# Altium PCB miaow_foc_board.PcbDoc (part 2 of 2)
Units mil, origin at the board's own origin, x right, y up, seen from the top; angles counter-clockwise.
Board outline 3070.7 x 3057.58 mil, 6 copper layers (SIG01, GND02, SIG03, PWR04, GND05, SIG06), stack 60.567 mil thick; 396 components, 384 nets, 1886 pads, 189 vias.
Unrouted connection lines stored in the file: 864.
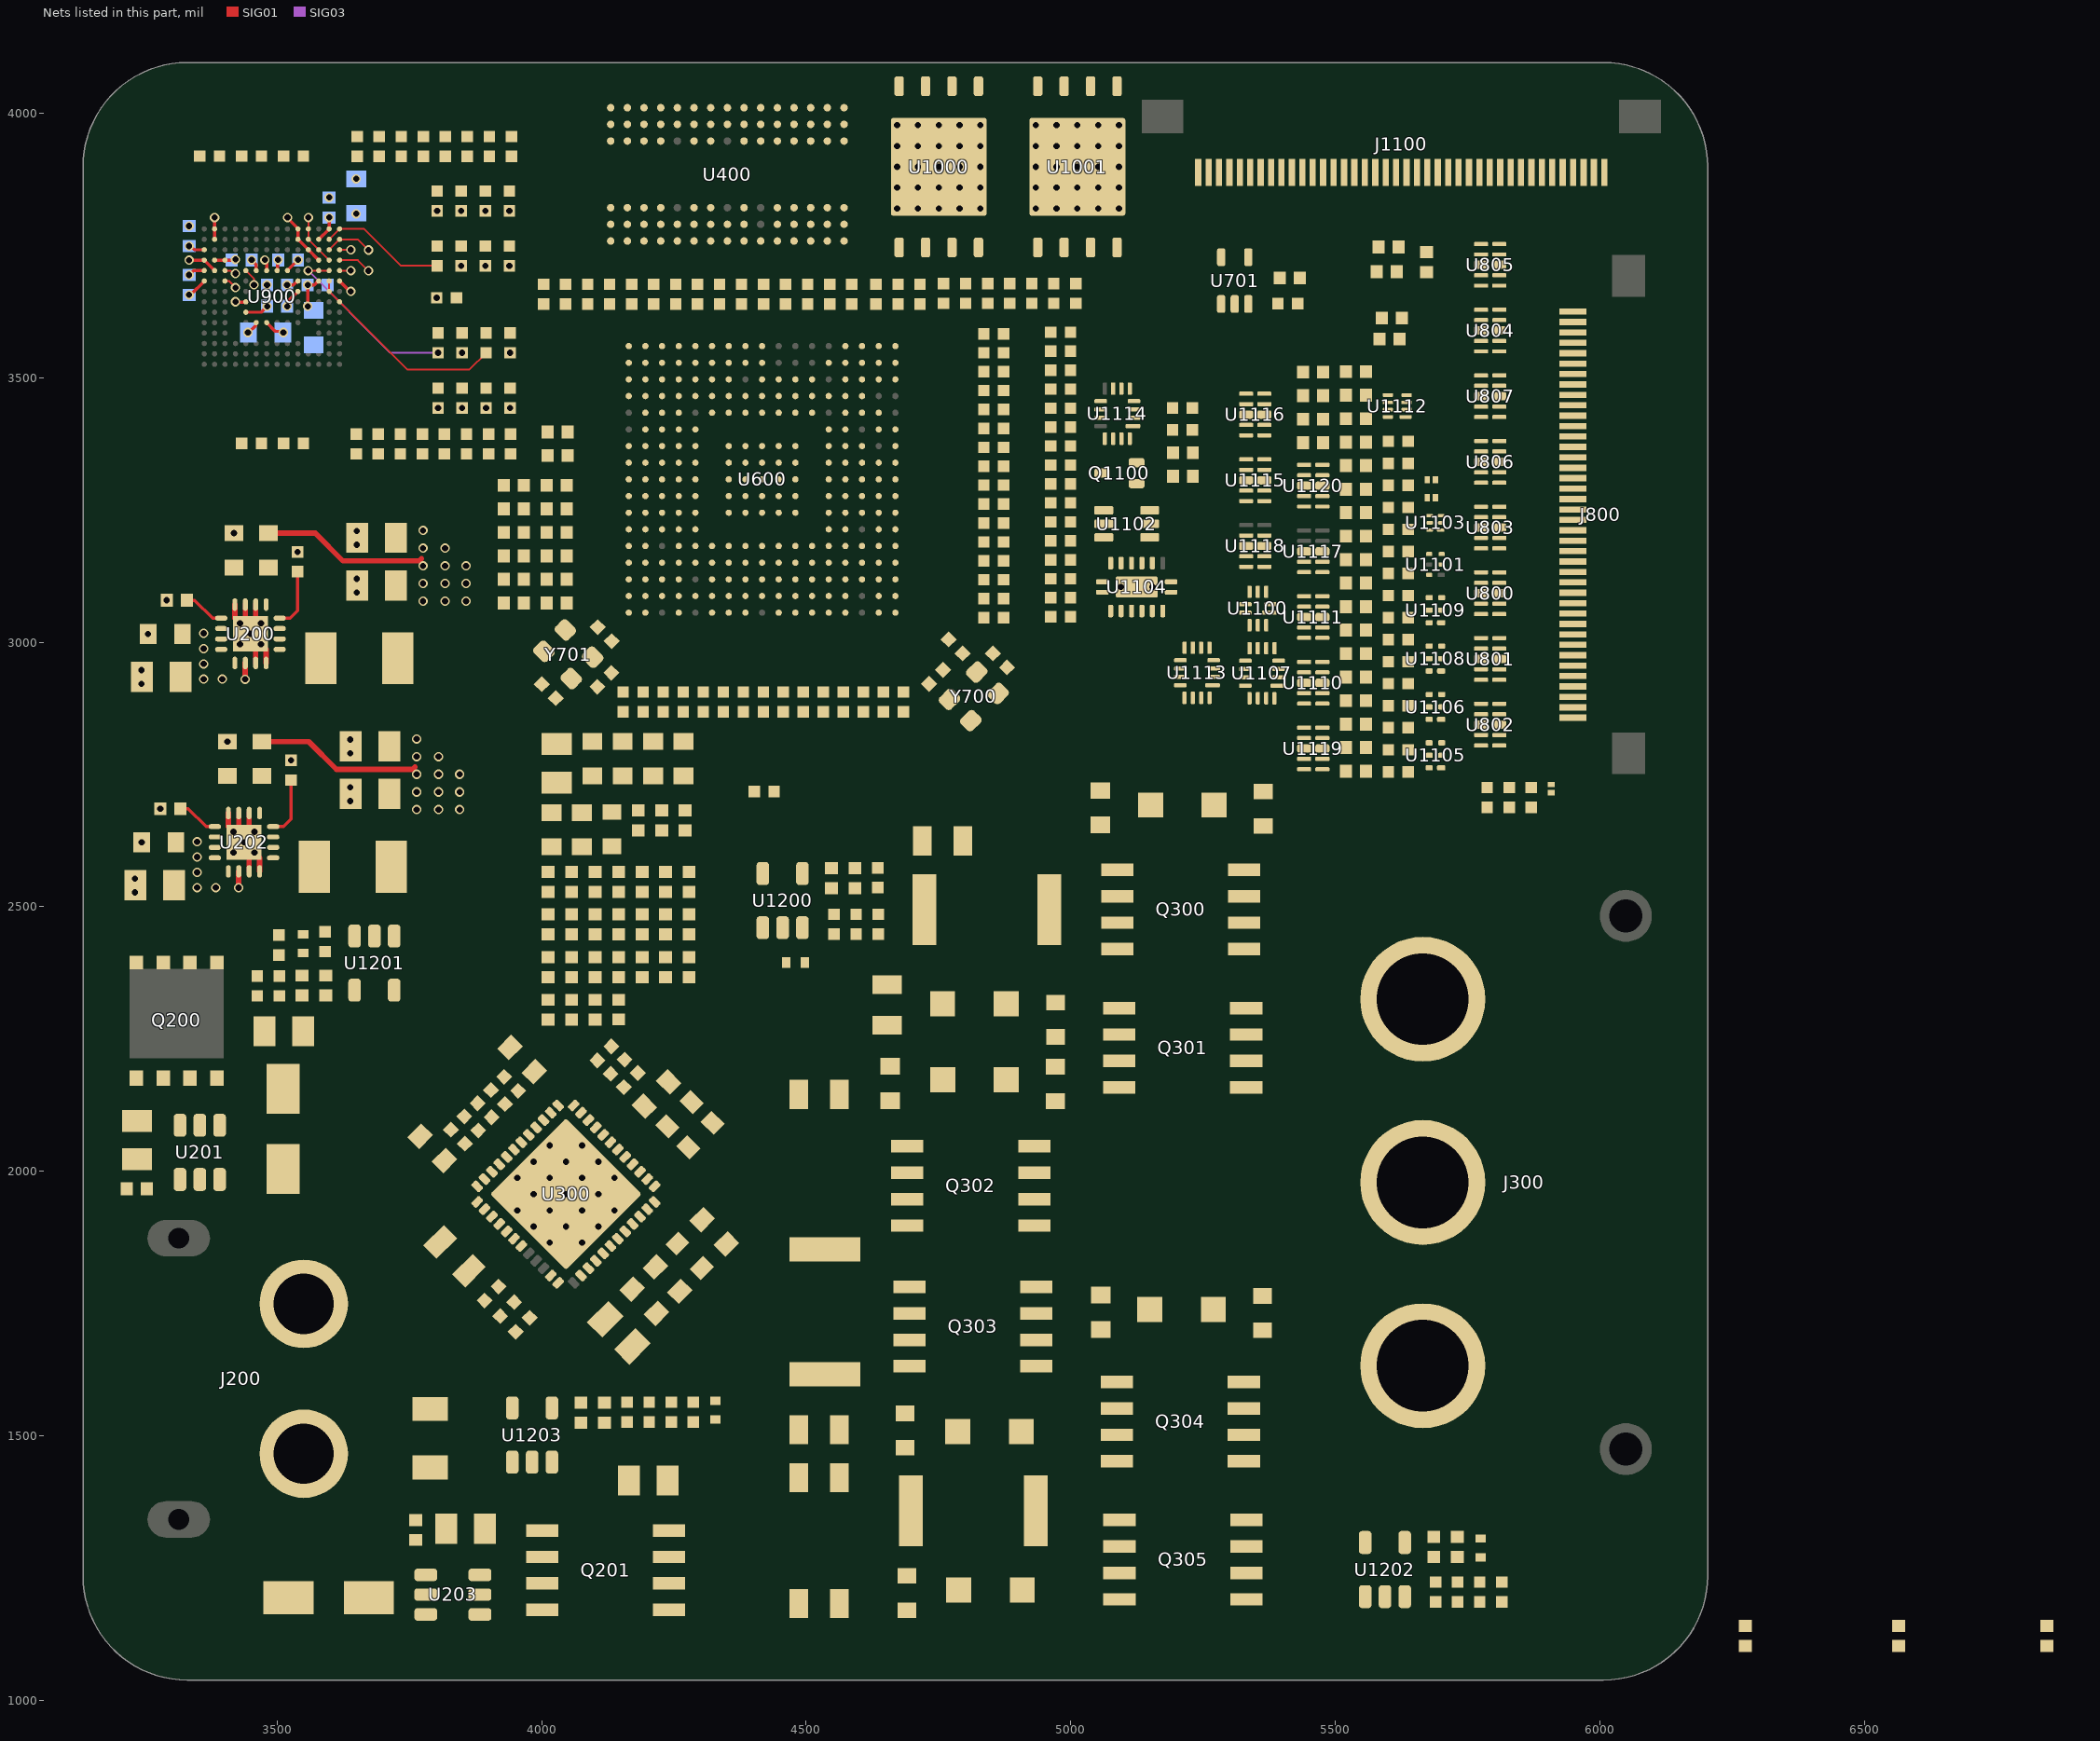
[diagram p6: the nets of this part, all layers, seen from the top]

## Part data
C200 C201 C205 C206 C207 C210 C211 C212 C214 C215 C300 C301 C302 C303 C304 C305 C306 C307 C308 C309 C310 C311 C312 C400 C401 C402 C403 C404 C405 C406 C407 C408 C409 C410 C411 C412 C413 C600 C601 C602 C603 C604 C605 C606 C607 C608 C609 C610 C611 C612 C613 C614 C615 C616 C617 C618 C619 C620 C621 C622 C623 C624 C625 C626 C627 C628 C629 C630 C631 C632 C633 C700 C701 C702 C703 C704 C705 C900 C901 C902 C903 C904 C905 C906 C907 C908 C909 C910 C1000 C1001 C1100 C1101 C1102 C1103 C1104 C1105 C1106 C1107 C1108 C1109 C1110 C1111 C1112 C1113 C1114 C1115 C1116 C1117 C1118 C1119 C1120 C1121 C1200 C1201 C1202 C1203 C1204 C1205 C1206 C1207: voltage=25V, precision=5%
C202 C203 C204 C208 C209 C213: voltage=50V, precision=5%
D200 D201: "TVS/ESD", Supplier Part Number 1=C316048, Supplier 1=LCSC
D300 D301 D302 D303 D304 D305: "TVS/ESD", Supplier Part Number 1=C123803, Supplier 1=LCSC
D800 D1100 D1101: "TVS/ESD", Supplier Part Number 1=C477989, Supplier 1=LCSC
J200: "CONNECTOR - dc supply", Supplier Part Number 1=C98732, Supplier 1=LCSC
J300: "CONNECTOR - 3pin, power", Supplier Part Number 1=C7437310, Supplier 1=LCSC
J800: library part FPC-RGBLCD, Supplier Part Number 1=C262674, Supplier 1=LCSC
J1100: library part FPC-DEBUG, "FPC", Supplier Part Number 1=C262674, Supplier 1=LCSC
L600: library part L, Code_IEC=1005, Code_JEITA=0402, LatestRevisionDate=29-May-2009, LatestRevisionNote="IPC-7351 Footprint Added.", PackageDescription="Chip Inductor", PackageReference=0402-A, Published=8-Jun-2000, Publisher="Altium Limited"
Q200: "NMOS", Supplier Part Number 1=C115943, Supplier 1=LCSC
Q201: "NMOS", Supplier Part Number 1=C535695, Supplier 1=LCSC
Q300 Q301 Q302 Q303 Q304 Q305: Supplier Part Number 1=C535695, Supplier 1=LCSC
Q1100: "PMOS", Supplier Part Number 1=C5334586, Supplier 1=LCSC
RT1200 RT1201 RT1202 RT1203: "NTC - 10K, 3380, 1%", Supplier Part Number 1=C13564, precision=1%, Supplier 1=LCSC
U200 U202: Supplier Part Number 1=C43590, Supplier 1=LCSC
U201 U203: "IDEAL DIODE", Supplier Part Number 1=C2941042, Supplier 1=LCSC
U300: Supplier Part Number 1=C545497, Supplier 1=LCSC
U400: Supplier Part Number 1=C1351419, ClassName=BGA, Supplier 1=LCSC
U600: "MCU", Supplier Part Number 1=C405932, Supplier 1=LCSC
U701: "AND GATE  - 1bit", Supplier Part Number 1=C7832, Supplier 1=LCSC
U800 U801 U802 U803 U804 U805 U806 U807 U1110 U1111 U1115 U1116 U1117 U1118 U1119 U1120: "TVS/ESD", Supplier Part Number 1=C2827679, Supplier 1=LCSC
U900: "EMMC", Supplier Part Number 1=826874-KLMAG2GEND-B031, Supplier 1="Win Source"
U1000 U1001: Supplier Part Number 1=C2802978, Supplier 1=LCSC
U1100: "LEVEL SHIFT", Supplier Part Number 1=C1882550, Supplier 1=LCSC
U1101: "INVERTER - 1bit schmitt", Supplier Part Number 1=C2878125, Supplier 1=LCSC
U1102: "LEVEL SHIFT", Supplier Part Number 1=C324081, Supplier 1=LCSC
U1103: "LEVEL SHIFT - 1bit, 0.65V - 3.6V, 500Mbps", Supplier Part Number 1=C2677436, Supplier 1=LCSC
U1104: "LEVEL SHIFT", Supplier Part Number 1=C22414342, Supplier 1=LCSC
U1105 U1106 U1108 U1109: "SCHMITT - 2bits", Supplier Part Number 1=C548609, Supplier 1=LCSC
U1107 U1113: "LEVEL SHIFT - 4bits, 0.65V - 3.6V, 310Mbps", Supplier Part Number 1=C779392, Supplier 1=LCSC
U1112: Supplier Part Number 1=C2652935, ComponentLink1Description=Datasheet, ComponentLink1URL=..\ds\txs0102dqer.pdf, Supplier 1=LCSC
U1114: "LEVEL SHIFT - 4bits, 2grps, 1.2V - 3.6V, 380Mbps", Supplier Part Number 1=C133244, Supplier 1=LCSC
U1200 U1201 U1202 U1203: "OPA - 1ch, 1.8V - 5.5V, r2r, 0.3mV, 10MHz, 10nVHz^0.5, 0.5pA", Supplier Part Number 1=C398358, Supplier 1=LCSC
Y700: Supplier Part Number 1=C717683, Supplier 1=LCSC
Y701: Supplier Part Number 1=C669098, Supplier 1=LCSC
L200 L201: Code_IEC=1005, Code_JEITA=0402, LatestRevisionDate=29-May-2009, LatestRevisionNote="IPC-7351 Footprint Added.", PackageDescription="Chip Inductor", PackageReference=0402-A, Published=8-Jun-2000, Publisher="Altium Limited"
R200 R201 R202 R203 R204 R205 R206 R300 R301 R302 R303 R304 R305 R306 R307 R308 R309 R310 R311 R312 R313 R314 R315 R316 R317 R318 R319 R320 R321 R322 R323 R324 R325 R326 R327 R328 R329 R600 R700 R701 R702 R703 R704 R705 R706 R707 R708 R709 R710 R711 R712 R713 R714 R715 R716 R717 R718 R719 R720 R721 R722 R723 R724 R725 R726 R727 R728 R729 R730 R731 R732 R733 R734 R735 R736 R737 R738 R739 R740 R741 R742 R743 R744 R745 R746 R747 R748 R749 R750 R751 R752 R753 R754 R755 R756 R757 R758 R759 R760 R761 R762 R763 R764 R765 R766 R767 R768 R769 R770 R771 R772 R773 R774 R775 R776 R777 R778 R779 R780 R781 R782 R783 R784 R785 R786 R787 R800 R801 R802 R900 R901 R902 R903 R904 R905 R906 R907 R908 R909 R910 R911 R912 R913 R914 R915 R916 R917 R918 R919 R920 R921 R1000 R1001 R1002 R1003 R1004 R1005 R1006 R1007 R1008 R1100 R1101 R1102 R1103 R1104 R1105 R1106 R1107 R1108 R1109 R1110 R1111 R1112 R1113 R1114 R1115 R1200 R1201 R1202 R1203 R1204 R1205 R1206 R1207 R1208 R1209 R1210 R1211 R1212 R1213 R1214 R1215 R1216: precision=1%

## Via types
v1: diameter 17.72, hole 11.81, SIG01 to SIG06, 166 vias
v2: diameter 17.72, hole 11.81, SIG01 to SIG06, tented top, 21 vias
v3: diameter 15.75, hole 11.81, SIG01 to SIG06, 2 vias

## Nets (pads, with @x,y where several pads share a name; then routed paths per layer and width w, separated by ;. In a path a pad name is that pad's centre, name@x,y a point inside that pad or via, vN(x,y) a via of type N, cw(c..) or ccw(c..) an arc to the next point about the centre after c; other vN are vias at no path point)
+3.3V: C1202.2 C1203.2 C1206.2 C1207.2 R1201.1 R1203.1 R1209.1 R1211.1 RT1200.2 RT1201.2 RT1202.2 RT1203.2 U1200.5 U1201.5 U1202.5 U1203.5
+3V3: C200.2 C201.2 C302.2 C307.1 C400.2 C401.2 C402.2 C403.2 C404.2 C405.2 C406.2 C407.2 C408.2 C409.2 C410.2 C411.2 C412.2 C413.2 C600.2 C601.2 C602.2 C603.2 C604.2 C605.2 C606.2 C607.2 C608.2 C609.2 C610.2 C611.2 C612.2 C613.2 C614.2 C615.2 C616.2 C617.2 C618.2 C619.2 C620.2 C621.2 C625.2 C626.2 C627.2 C628.2 C629.2 C702.2 C703.1 C704.1 C705.1 C900.2 C901.2 C902.2 C903.2 C904.2 C905.2 C906.2 C907.2 C908.2 C909.2 C910.2 C1000.2 C1001.2 C1100.2 C1101.1 C1102.2 C1104.2 C1105.1 C1106.2 C1107.1 C1108.1 C1109.1 C1114.1 C1115.2 C1116.2 C1117.1 C1118.1 C1119.1 C1120.2 C1121.2 J800.6 J800.7 J1100.6 J1100.7 L200.2 L600.1 Q1100.S R200.2 R201.2 R302.1 R303.1 R304.1 R772.1 R784.2 R786.1 R787.1 R900.1 R902.1 R904.1 R906.1 R908.1 R910.1 R912.1 R914.1 R916.1 R920.1 R1000.2 R1100.1 U200.14 U300.26 U300.36 U400.A7 U400.B2 U400.B7 U400.C9 U400.D9 U400.E1 U400.F9 U400.L1 U400.L7 U400.M9 U400.N9 U400.P2 U400.P7 U400.R7 U600.A6 U600.B1 U600.C17 U600.E6 U600.E9 U600.E11 U600.F5 U600.F17 U600.G5 U600.G13 U600.G17 U600.H5 U600.H13 U600.J13 U600.K5 U600.K13 U600.L5 U600.L13 U600.M5 U600.M13 U600.N7 U600.N8 U600.N10 U600.N11 U600.N12 U600.P17 U600.U12 U701.5 U900.B1 U900.C2 U900.C6 U900.E6 U900.F5 U900.J10 U900.K9 U900.M4 U900.N4 U900.P3 U900.P5 U1000.8 U1001.8 U1100.1 U1100.6 U1100.7 U1101.6 U1102.1 U1102.6 U1103.1 U1103.5 U1103.6 U1104.1 U1104.16 U1107.5 U1107.13 U1107.14 U1107.15 U1112.1 U1112.8 U1113.5 U1113.13 U1113.14 U1113.15 U1114.2 U1114.3 U1114.5 Y700.4 Y701.4 | length 679.4
  SIG01 w6: v1(3333.65,3694.44) 3334.22,3694.44 3342.32,3702.54 U900.P5@3362.18,3702.54 ; v1(3333.65,3748.81) 3336.62,3748.81 3343.52,3741.91 U900.P3@3362.18,3741.91 ; U900.N4@3381.87,3722.22 3413.79,3722.22 v1@3414.09,3722.52 ; v1@3418.79,3722.22 v1@3419.09,3722.52 ; U900.K9@3440.92,3623.8 3470.16,3623.8 v1(3481.31,3634.94) ; v1(3444.79,3585.49) 3446.48,3585.49 3459.87,3598.88 3459.87,3603.38 U900.J10@3460.61,3604.11 ; v1(3518.81,3675.4) 3531.11,3675.4 3538.56,3682.85 U900.E6@3539.35,3682.85 ; U900.F5@3519.66,3702.54 3519.66,3702.78 v1(3539.53,3722.65) ; v1@3537.53,3720.41 v1@3537.53,3722.65 ; v1(3558,3634.94) v1(3558,3675.4) 3570.46,3675.4 3577.91,3682.85 U900.C6@3578.72,3682.85 ; U900.C2@3578.72,3761.59 U900.B1@3598.4,3781.28 v1(3598.4,3802.94)
  SIG01 w10: v1(3439.46,2929.92) 3439.65,2930.11 3439.65,2960.7 U200.14@3439.83,2960.88 ; R201.2@3483.45,3206.23 3572.03,3206.23 3624.63,3153.63 3768.62,3153.63 3772.96,3157.98
  other v1: 3775.88,3077.59 3817.33,3077.59 3857.23,3077.59 3775.88,3111.01 3817.33,3111.01 3857.23,3111.01 3775.88,3144.43 3817.33,3144.43 3857.23,3144.43 3538.53,3170.8 3775.88,3177.85 3817.33,3177.85 3775.88,3211.28 3849.59,3442.99 3940.54,3442.99 3849.59,3547.07 3940.54,3547.07 3848,3711.47 3938.96,3711.47 3421.37,3723.65 3649.52,3810.02 3848,3815.54 3938.96,3815.54
+5V: C210.2 C211.2 J800.1 J800.2 J1100.1 J1100.2 L201.2 R204.2 R205.2 U202.14 | length 344.2
  SIG01 w10: v1(3427.21,2535.93) 3427.4,2536.11 3427.4,2566.7 U202.14@3427.58,2566.88 ; 3471.2,2812.23 3559.78,2812.23 3612.38,2759.64 3756.37,2759.64 3760.71,2763.98
  other v1: 3763.63,2683.59 3805.08,2683.59 3844.98,2683.59 3763.63,2717.01 3805.08,2717.01 3844.98,2717.01 3763.63,2750.43 3805.08,2750.43 3844.98,2750.43 3526.28,2776.8 3763.63,2783.86 3805.08,2783.86 3406.28,2812.23 3763.63,2817.28
_9: J1100.9 R1101.2 U1110.1 U1110.10
_10: J1100.10 U1100.4 U1110.2 U1110.9
_11: J1100.11 R1105.2 U1110.4 U1110.7
_13: J1100.13 R1107.2 U1110.5 U1110.6
_14: J1100.14 R1108.2 U1111.1 U1111.10
_15: J1100.15 R1109.2 U1111.2 U1111.9
_16: J1100.16 R1110.2 U1111.4 U1111.7
_17: J1100.17 R1111.2 U1111.5 U1111.6
_19: J1100.19 U1105.6 U1115.1 U1115.10
_20: J1100.20 U1105.4 U1115.2 U1115.9
_21: J1100.21 U1106.6 U1115.4 U1115.7
_22: J1100.22 U1106.4 U1115.5 U1115.6
_23: J1100.23 U1108.1 U1116.1 U1116.10
_24: J1100.24 U1108.3 U1116.2 U1116.9
_25: J1100.25 U1109.1 U1116.4 U1116.7
_26: J1100.26 U1109.3 U1116.5 U1116.6
_27: J1100.27 U1112.7 U1117.1 U1117.10
_28: J1100.28 U1112.6 U1117.2 U1117.9
_29: J1100.29 R1113.1 U1118.1 U1118.10
_30: J1100.30 R1114.1 U1118.2 U1118.9
_31: J1100.31 U1114.9 U1118.4 U1118.7
_32: J1100.32 U1107.12 U1119.1 U1119.10
_33: J1100.33 U1107.11 U1119.2 U1119.9
_34: J1100.34 U1107.10 U1119.4 U1119.7
_35: J1100.35 U1107.9 U1119.5 U1119.6
_36: J1100.37 U1113.12 U1120.1 U1120.10
_37: J1100.38 U1113.11 U1120.2 U1120.9
_38: J1100.39 U1113.10 U1120.4 U1120.7
_39: J1100.40 U1113.9 U1120.5 U1120.6
_D3: R907.2 U900.A1 U900.B2 | length 241.2
  SIG01 w3.5: U900.B2@3598.4,3761.59 U900.A1@3618.09,3781.28 3664.59,3781.28 3734.4,3711.47 R907.2@3802.53,3711.47
_D4: R909.2 U900.A2 U900.B3 | length 90.8
  SIG01 w3.5: U900.B3@3598.4,3741.91 U900.A2@3618.09,3761.59 3652.54,3761.59 v1(3672.71,3741.42)
  other v1: 3804.11,3442.99
_D5: R911.2 U900.B4 U900.C3 U900.D1 U900.D2 | length 97
  SIG01 w3.5: v1(3559.03,3802.94) U900.D2@3559.03,3761.59 U900.B4@3598.4,3722.22
  other v1: 3895.07,3442.99
_D6: R913.2 U900.B5 U900.C5 | length 348.1
  SIG01 w3.5: v1(3558.88,3702.45) v1(3558.88,3702.45) U900.C5@3577.66,3702.51 ; U900.C5@3578.72,3702.54 U900.B5@3598.4,3702.54
  SIG03 w3.5: v1(3558.88,3702.45) 3714.27,3547.07 v1(3804.11,3547.07)
_D7: R915.2 U900.A8 U900.B6 U900.B7 | length 390.5
  SIG01 w3.5: U900.B6@3598.4,3682.85 U900.B7@3598.4,3663.17 U900.A8@3618.09,3643.48 3745.94,3515.63 3863.62,3515.63 R915.2@3895.07,3547.07
A0: R763.2 U400.G8
A1: R765.2 U400.G9
A2: R766.2 U400.F7
A3: R767.2 U400.F3
A4: R768.2 U400.G1
A5: R769.2 U400.G2
A6: R779.2 U400.G3
A7: R780.2 U400.H1
A8: R782.2 U400.H2
A9: R783.2 U400.J3
A10: R701.2 U400.G7
A11: R704.2 U400.H9
B0: J800.12 U600.D11 U801.1 U801.10
B1: J800.16 U600.C9 U802.1 U802.10
B2: J800.19 U600.E14 U802.5 U802.6
B3: J800.18 U600.B10 U802.4 U802.7
B4: J800.17 U600.C8 U802.2 U802.9
B5: J800.15 U600.B8 U801.5 U801.6
B6: J800.14 U600.A8 U801.4 U801.7
B7: J800.13 U600.C7 U801.2 U801.9
BA0: R709.2 U400.J7
BA1: R712.2 U400.H8
BL: D800.1 J800.3 U600.A14
BOOT0: C702.1 R785.2 U600.E8 U1108.6
CLK: J800.37 U600.H3
CMD: R916.2 R917.1 U600.C11
D0: R729.2 U400.R8
D1: R731.2 U400.N7
D2: R700.2 U400.R9
D3: R703.2 U400.N8
D4: R746.2 U400.P9
D5: R748.2 U400.M8
D6: R750.2 U400.M7
D7: R752.2 U400.L8
D8: R754.2 U400.L2
D9: R756.2 U400.M3
D10: R758.2 U400.M2
D11: R760.2 U400.P1
D12: R761.2 U400.N2
D13: R717.2 U400.R1
D14: R720.2 U400.N3
D15: R724.2 U400.R2
D16: R745.2 U400.E8
D17: R747.2 U400.D7
D18: R749.2 U400.D8
D19: R751.2 U400.B9
D20: R753.2 U400.C8
D21: R755.2 U400.A9
D22: R757.2 U400.C7
D23: R759.2 U400.A8
D24: R702.2 U400.A2
D25: R705.2 U400.C3
D26: R706.2 U400.A1
D27: R707.2 U400.C2
D28: R714.2 U400.B1
D29: R716.2 U400.D2
D30: R722.2 U400.D3
D31: R725.2 U400.E2
DBG_A_RX: U600.U2 U1107.2
DBG_A_TX: U600.A11 U1107.1
DBG_B_RX: U600.P12 U1107.4
DBG_B_TX: U600.P11 U1107.3
DBG_C_RX: U600.N4 U1113.2
DBG_C_TX: U600.N5 U1113.1
DBG_D_RX: U600.D12 U1113.4
DBG_D_TX: U600.C12 U1113.3
DBG_MISO: R1115.2 U600.M3
DBG_MOSI: R764.2 U1114.14
DBG_SCL: U600.R17 U1112.3
DBG_SCLK: R727.2 U1114.15
DBG_SDA: U600.R16 U1112.2
DE: J800.9 U600.D7 U800.2 U800.9
DM0: R733.2 U400.K9
DM1: R735.2 U400.K1
DM2: R710.2 U400.F8
DM3: R713.2 U400.F2
DRV_AGND: C307.2 R327.1 U300.35
DRV_AH: R719.2 U300.37
DRV_BH: R723.2 U300.39
DRV_CAL: U300.34 U600.H17
DRV_CH: R726.2 U300.41
DRV_CS: R311.1 R708.2
DRV_EN: R306.2 U300.33 U701.4
DRV_FLT: R308.1 U600.H16
DRV_PGND: C208.1 C209.1 C300.1 C301.1 C304.1 C306.1 C308.2 C309.1 C310.1 C311.1 C312.1 D200.1 J200.1 R202.1 R318.1 R323.1 R326.1 R327.2 R328.1 U203.2 U300.2 U300.12 U300.13 U300.22
DRV_PHASE_A: D300.1 J300.1 Q300.1 Q300.2 Q300.3 Q301.5 Q301.6 Q301.7 Q301.8 R301.1 U300.9
DRV_PHASE_B: D302.1 J300.2 Q302.1 Q302.2 Q302.3 Q303.5 Q303.6 Q303.7 Q303.8 R310.1 U300.16
DRV_PHASE_C: D304.1 J300.3 Q304.1 Q304.2 Q304.3 Q305.5 Q305.6 Q305.7 Q305.8 R321.1 U300.19
DRV_SCLK: R312.1 R711.2
DRV_SDI: R715.2 U300.30
DRV_SDO: R313.1 U600.R3
DRV_SNS_A: R316.1 U600.T1
DRV_SNS_B: R317.1 U600.T2
DRV_SNS_BUS: C308.1 R322.2 R323.2 U600.U4
DRV_SNS_C: R319.1 U600.T4
DRV_VDRAIN: C208.2 C300.2 C301.2 C303.2 C304.2 C306.2 Q201.5 Q201.6 Q201.7 Q201.8 Q300.5 Q300.6 Q300.7 Q300.8 Q302.5 Q302.6 Q302.7 Q302.8 Q304.5 Q304.6 Q304.7 Q304.8 R322.1 R329.1 U203.4 U300.6 U300.7
EMMC_CLK: R918.1 U600.B11
EMMC_D0: R900.2 R901.1 U600.U15
EMMC_D1: R902.2 R903.1 U600.T15
EMMC_D2: R904.2 R905.1 U600.B9
EMMC_D3: R906.2 R907.1 U600.B7
EMMC_D4: R908.2 R909.1 U600.D5
EMMC_D5: R910.2 R911.1 U600.D4
EMMC_D6: R912.2 R913.1 U600.F14
EMMC_D7: R914.2 R915.1 U600.F13
EN: C1103.1 D1100.2 J1100.8 R1100.2 R1102.2 U1100.2 U1101.2 U1104.9 U1107.7 U1113.7 U1114.1 U1114.16
FR_DBG1: C701.1 R784.1 U600.E7 U1108.4
FR_DBG2: U600.E4 U1109.6
FR_DBG3: U600.F4 U1109.4
G0: J800.24 U600.T5 U804.1 U804.10
G1: J800.20 U600.U5 U803.1 U803.10
G2: J800.27 U600.P5 U804.5 U804.6
G3: J800.26 U600.A9 U804.4 U804.7
G4: J800.25 U600.K14 U804.2 U804.9
G5: J800.23 U600.J14 U803.5 U803.6
G6: J800.22 U600.J15 U803.4 U803.7
G7: J800.21 U600.B12 U803.2 U803.9
GMCUA: C200.1 C201.1 C202.1 C203.1 C204.1 C205.1 C206.1 C210.1 C211.1 C213.1 C214.1 C215.1 C302.1 C400.1 C401.1 C402.1 C403.1 C404.1 C405.1 C406.1 C407.1 C408.1 C409.1 C410.1 C411.1 C412.1 C413.1 C600.1 C601.1 C602.1 C603.1 C604.1 C605.1 C606.1 C607.1 C608.1 C609.1 C610.1 C611.1 C612.1 C613.1 C614.1 C615.1 C616.1 C617.1 C618.1 C619.1 C620.1 C621.1 C622.1 C623.1 C624.1 C625.1 C626.1 C627.1 C628.1 C629.1 C630.1 C631.1 C632.1 C633.1 C700.2 C701.2 C703.2 C704.2 C705.2 C900.1 C901.1 C902.1 C903.1 C904.1 C905.1 C906.1 C907.1 C908.1 C909.1 C910.1 C1000.1 C1001.1 C1100.1 C1101.2 C1102.1 C1103.2 C1104.1 C1105.2 C1106.1 C1107.2 C1108.2 C1109.2 C1110.1 C1111.2 C1112.1 C1113.1 C1114.2 C1115.1 C1116.1 C1117.2 C1118.2 C1119.2 C1120.1 C1121.1 D201.1 D800.2 D1100.1 D1101.2 J800.4 J800.5 J800.36 J1100.4 J1100.5 J1100.12 J1100.18 J1100.36 R202.2 R203.1 R206.1 R306.1 R785.1 R919.1 R1112.2 R1200.2 U200.6 U200.7 U200.8 U200.15 U200.16 U200.17 U201.2 U202.6 U202.7 U202.8 U202.15 U202.16 U202.17 U300.27 U300.43 U300.47 U300.48 U300.49 U400.A3 U400.B3 U400.B8 U400.C1 U400.D1 U400.E9 U400.F1 U400.L3 U400.L9 U400.M1 U400.N1 U400.P3 U400.P8 U400.R3 U600.A1 U600.A17 U600.B2 U600.B6 U600.C10 U600.C13 U600.C16 U600.F1 U600.F2 U600.G2 U600.G7 U600.G8 U600.G9 U600.G10 U600.G11 U600.G16 U600.H7 U600.H8 U600.H9 U600.H10 U600.H11 U600.J3 U600.J7 U600.J8 U600.J9 U600.J10 U600.J11 U600.J16 U600.J17 U600.K7 U600.K8 U600.K9 U600.K10 U600.K11 U600.K15 U600.L7 U600.L8 U600.L9 U600.L10 U600.L11 U600.L15 U600.M15 U600.N1 U600.N16 U600.P1 U600.R4 U600.R8 U600.T12 U600.U1 U600.U17 U701.3 U800.3 U800.8 U801.3 U801.8 U802.3 U802.8 U803.3 U803.8 U804.3 U804.8 U805.3 U805.8 U806.3 U806.8 U807.3 U807.8 U900.A6 U900.C4 U900.D3 U900.E1 U900.E2 U900.E7 U900.G5 U900.H10 U900.J5 U900.K8 U900.N1 U900.N2 U900.N5 U900.P4 U900.P6 U1000.4 U1000.9 U1001.4 U1001.9 U1100.3 U1100.10 U1101.3 U1102.2 U1103.2 U1104.8 U1104.17 U1105.2 U1106.2 U1107.6 U1107.8 U1107.16 U1108.2 U1109.2 U1110.3 U1110.8 U1111.3 U1111.8 U1112.4 U1113.6 U1113.8 U1113.16 U1114.4 U1114.10 U1114.11 U1115.3 U1115.8 U1116.3 U1116.8 U1117.3 U1117.8 U1118.3 U1118.8 U1119.3 U1119.8 U1120.3 U1120.8 Y700.2 Y701.2 | length 860.4
  SIG01 w6: v1(3333.62,3722.22) U900.P4@3362.18,3722.22 U900.N5@3381.87,3702.54 ; v1(3333.65,3656.64) 3336.56,3656.64 U900.P6@3362.18,3682.26 ; U900.N2@3381.87,3761.59 U900.N1@3381.87,3781.28 v1(3381.87,3802.94) ; v1@3422.37,3642.61 3422.81,3643.05 3440.49,3643.05 U900.K8@3440.92,3643.48 ; v1(3451.88,3722.65) 3460.61,3713.93 U900.J5@3460.61,3702.54 ; U900.H10@3480.29,3604.11 3496.67,3587.73 3509.48,3587.73 v1(3511.72,3585.49) ; U900.G5@3499.98,3702.54 3500.71,3703.27 3500.71,3721.62 v1(3501.74,3722.65) ; v1(3519.66,3802.94) 3519.66,3801.9 3539.35,3782.21 U900.E1@3539.35,3781.28 U900.E2@3539.35,3761.59 U900.D3@3559.03,3741.91 U900.C4@3578.72,3722.22 ; v1@3521.12,3634.94 v1(3519.1,3634.94) 3521.35,3637.19 3521.35,3645.17 U900.E7@3539.35,3663.17 ; U900.A6@3618.09,3682.85 3637.77,3663.17 v1(3639.26,3663.17)
  SIG01 w10: U202.8@3407.89,2677.12 3407.89,2651.52 U202.17@3417.74,2641.68 ; U200.8@3420.15,3071.11 3420.15,3045.52 v1(3429.99,3035.68) ; U202.17@3427.58,2631.84 U202.7@3427.58,2677.12 ; U202.17@3437.42,2622 3447.26,2612.15 U202.15@3447.26,2566.88 ; U200.17@3439.83,3025.84 U200.7@3439.83,3071.11 ; U202.6@3447.26,2677.12 3447.26,2650.07 3455.65,2641.68 U202.17@3457.11,2641.68 ; v1(3449.67,3016) 3459.52,3006.15 U200.15@3459.52,2960.88 ; U202.17@3457.11,2602.31 3466.95,2592.47 U202.16@3466.95,2566.88 ; U200.6@3459.52,3071.11 3459.52,3044.07 3467.9,3035.68 v1(3469.36,3035.68) ; v1(3469.36,2996.31) 3479.2,2986.47 U200.16@3479.2,2960.88
  other v1: 3231.28,2527.31 3231.28,2553.31 3243.91,2621.69 3279.15,2685.31 3638.32,2699.9 3638.32,2725.91 3638.32,2790.13 3638.32,2816.14 3243.53,2921.31 3243.53,2947.31 3429.99,2996.31 3256.17,3015.69 3291.4,3079.31 3650.57,3093.9 3650.57,3119.91 3650.57,3184.13 3418.53,3206.23 3650.57,3210.13 3421.37,3643.61 3481.01,3675.4 3333.65,3786.6 4671.87,3819.87 4711.24,3819.87 4750.61,3819.87 4789.98,3819.87 4829.35,3819.87 4933.85,3819.87 4973.23,3819.87 5012.6,3819.87 5051.97,3819.87 5091.34,3819.87 3598.4,3840.73 4671.87,3859.24 4711.24,3859.24 4750.61,3859.24 4789.98,3859.24 4829.35,3859.24 4933.85,3859.24 4973.23,3859.24 5012.6,3859.24 5051.97,3859.24 5091.34,3859.24 3649.52,3875.97 4671.87,3898.61 4711.24,3898.61 4750.61,3898.61 4789.98,3898.61 4829.35,3898.61 4933.85,3898.61 4973.23,3898.61 5012.6,3898.61 5051.97,3898.61 5091.34,3898.61 4671.87,3937.98 4711.24,3937.98 4750.61,3937.98 4789.98,3937.98 4829.35,3937.98 4933.85,3937.98 4973.23,3937.98 5012.6,3937.98 5051.97,3937.98 5091.34,3937.98 4671.87,3977.35 4711.24,3977.35 4750.61,3977.35 4789.98,3977.35 4829.35,3977.35 4933.85,3977.35 4973.23,3977.35 5012.6,3977.35 5051.97,3977.35 5091.34,3977.35
  other v2: 4015.3,1864.93 4076.55,1864.93 3984.68,1895.55 4045.93,1895.55 4107.17,1895.55 3954.06,1926.17 4015.3,1926.17 4076.55,1926.17 4137.79,1926.17 3984.68,1956.79 4045.93,1956.79 4107.17,1956.79 3954.06,1987.42 4015.3,1987.42 4076.55,1987.42 4137.79,1987.42 3984.68,2018.04 4045.93,2018.04 4107.17,2018.04 4015.3,2048.66 4076.55,2048.66
  other v3: 5094.7,3104.35 5154.7,3104.35
GNTC: C1202.1 C1203.1 C1206.1 C1207.1 R1200.1 R1205.1 R1206.1 R1207.1 R1208.1 R1213.1 R1214.1 R1215.1 R1216.1 U1200.2 U1201.2 U1202.2 U1203.2
HSYNC: J800.11 U600.H1 U800.5 U800.6
LCD_INT: R800.2 U600.D10
LCD_R0: J800.28 U600.D9 U805.1 U805.10
LCD_R1: J800.32 U600.N6 U806.1 U806.10
LCD_R2: J800.35 U600.P6 U806.5 U806.6
LCD_R3: J800.34 U600.T6 U806.4 U806.7
LCD_R4: J800.33 U600.U6 U806.2 U806.9
LCD_R5: J800.31 U600.U7 U805.5 U805.6
LCD_R6: J800.30 U600.E15 U805.4 U805.7
LCD_R7: J800.29 U600.G15 U805.2 U805.9
LCD_RST: J800.8 U600.E10 U800.1 U800.10
LCD_SCL: R801.2 U600.P3
LCD_SDA: R802.2 U600.P4
LCD_VSYNC: J800.10 U600.H2 U800.4 U800.7
NEN: U1101.4 U1102.5 U1112.5
NetC202_2: C202.2 C207.1 C209.2 C212.1 D200.2 D201.2 J200.2 Q200.1 Q200.2 Q200.3 Q201.1 Q201.2 Q201.3 U201.3 U201.6 U203.3 U203.6
NetC206_2: C206.2 U200.9 | length 79.4
  SIG01 w6: C206.2@3329.2,3079.31 3344.22,3079.31 3378.01,3045.52 U200.9@3394.55,3045.52
NetC207_2: C207.2 U201.1
NetC212_2: C212.2 U203.1
NetC215_2: C215.2 U202.9 | length 79.4
  SIG01 w6: C215.2@3316.95,2685.31 3331.97,2685.31 3365.76,2651.52 U202.9@3382.3,2651.52
NetC303_1: C303.1 U300.5
NetC305_1: C305.1 U300.3
NetC305_2: C305.2 U300.4
NetC309_2: C309.2 D301.1 Q301.1 Q301.2 Q301.3 R307.1 R318.2 U300.11
NetC310_2: C310.2 D303.1 Q303.1 Q303.2 Q303.3 R315.1 R326.2 U300.14
NetC311_2: C311.2 D305.1 Q305.1 Q305.2 Q305.3 R325.1 R328.2 U300.21
NetC312_2: C312.2 R329.2
NetC622_2: C622.2 U600.U11
NetC623_2: C623.2 U600.D17
NetC624_2: C624.2 U600.A7
NetC1200_2: C1200.2 R1201.2 R1202.2 R1205.2 U1200.4
NetC1201_2: C1201.2 R1203.2 R1204.2 R1206.2 U1201.4
NetC1204_1: C1204.1 R1210.1 U1202.1
NetC1204_2: C1204.2 R1209.2 R1210.2 R1213.2 U1202.4
NetC1205_1: C1205.1 R1212.1 U1203.1
NetC1205_2: C1205.2 R1211.2 R1212.2 R1214.2 U1203.4
NetD300_2: D300.2 Q300.4 R300.2 R301.2
NetD301_2: D301.2 Q301.4 R305.2 R307.2
NetD302_2: D302.2 Q302.4 R309.2 R310.2
NetD303_2: D303.2 Q303.4 R314.2 R315.2
NetD304_2: D304.2 Q304.4 R320.2 R321.2
NetD305_2: D305.2 Q305.4 R324.2 R325.2
NetD1101_1: D1101.1 J1100.3 U1103.3
NetL200_1: L200.1 U200.1 U200.2 U200.3
NetL201_1: L201.1 U202.1 U202.2 U202.3
NetQ200_4: Q200.4 U201.5
NetQ201_4: Q201.4 U203.5
NetQ1100_G: Q1100.G R1102.1
NetR200_1: R200.1 U200.4 | length 113.4
  SIG01 w6: U200.4@3504.79,3045.52 3524.55,3045.52 3538.53,3059.51 R200.1@3538.53,3133.4
NetR201_1: R201.1 R203.2 U200.5
NetR204_1: R204.1 U202.4 | length 113.4
  SIG01 w6: U202.4@3492.54,2651.52 3512.3,2651.52 3526.28,2665.51 R204.1@3526.28,2739.4
NetR205_1: R205.1 R206.2 U202.5
NetR300_1: R300.1 U300.8
NetR302_2: R302.2 U300.38
NetR303_2: R303.2 U300.40
NetR304_2: R304.2 U300.42
NetR305_1: R305.1 U300.10
NetR308_2: R308.2 U300.28
NetR309_1: R309.1 U300.17
NetR311_2: R311.2 U300.32
NetR312_2: R312.2 U300.31
NetR313_2: R313.2 U300.29
NetR314_1: R314.1 U300.15
NetR316_2: R316.2 U300.25
NetR317_2: R317.2 U300.24
NetR319_2: R319.2 U300.23
NetR320_1: R320.1 U300.18
NetR324_1: R324.1 U300.20
NetR700_1: R700.1 U600.D13
NetR701_1: R701.1 U600.T8
NetR702_1: R702.1 U600.A16
NetR703_1: R703.1 U600.E12
NetR704_1: R704.1 U600.U8
NetR705_1: R705.1 U600.A15
NetR706_1: R706.1 U600.B15
NetR707_1: R707.1 U600.C14
NetR708_1: R708.1 U600.U3
NetR709_1: R709.1 U600.H14
NetR710_1: R710.1 U600.A4
NetR711_1: R711.1 U600.T3
NetR712_1: R712.1 U600.G14
NetR713_1: R713.1 U600.A3
NetR714_1: R714.1 U600.A2
NetR715_1: R715.1 U600.R5
NetR716_1: R716.1 U600.B3
NetR717_1: R717.1 U600.U16
NetR718_1: R718.1 U600.F15
NetR719_1: R719.1 U600.D15
NetR720_1: R720.1 U600.T17
NetR721_1: R721.1 U600.A10
NetR722_1: R722.1 U600.E2
NetR723_1: R723.1 U600.D14
NetR724_1: R724.1 U600.T16
NetR725_1: R725.1 U600.F3
NetR726_1: R726.1 U600.E17
NetR727_1: R727.1 U600.E16
NetR728_1: R728.1 U600.C15
NetR729_1: R729.1 U600.P16
NetR730_1: R730.1 U600.D8
NetR731_1: R731.1 U600.P15
NetR732_1: R732.1 U600.D6
NetR733_1: R733.1 U600.C4
NetR734_1: R734.1 U600.N2
NetR735_1: R735.1 U600.B4
NetR736_1: R736.1 U600.P2
NetR737_1: R737.1 U600.C3
NetR738_1: R738.1 U600.C6
NetR739_1: R739.1 U600.D3
NetR740_1: R740.1 U600.D2
NetR741_1: R741.1 U600.A5
NetR742_1: R742.1 U600.D1
NetR743_1: R743.1 U600.B5
NetR744_1: R744.1 U600.E5
NetR745_1: R745.1 U600.T13
NetR746_1: R746.1 U600.U9
NetR747_1: R747.1 U600.R13
NetR748_1: R748.1 U600.T9
NetR749_1: R749.1 U600.P13
NetR750_1: R750.1 U600.P9
NetR751_1: R751.1 U600.P14
NetR752_1: R752.1 U600.N9
NetR753_1: R753.1 U600.R14
NetR754_1: R754.1 U600.P10
NetR755_1: R755.1 U600.D16
NetR756_1: R756.1 U600.R10
NetR757_1: R757.1 U600.B17
NetR758_1: R758.1 U600.T10
NetR759_1: R759.1 U600.B16
NetR760_1: R760.1 U600.U10
NetR761_1: R761.1 U600.R11
NetR762_1: R762.1 U600.L2
NetR763_1: R763.1 U600.G4
NetR764_1: R764.1 U600.M2
NetR765_1: R765.1 U600.G3
NetR766_1: R766.1 U600.G1
NetR767_1: R767.1 U600.H4
NetR768_1: R768.1 U600.J5
NetR769_1: R769.1 U600.J4
NetR770_1: R770.1 U600.K2
NetR771_1: R771.1 U600.K3
NetR773_1: R773.1 U600.K4
NetR774_1: R774.1 U600.L4
NetR775_1: R775.1 U600.J2
NetR775_2: R775.2 Y700.3
NetR776_1: R776.1 U600.L3
NetR777_1: R777.1 U600.B13
NetR778_1: R778.1 U600.T7
NetR779_1: R779.1 U600.R7
NetR780_1: R780.1 U600.P7
NetR781_1: R781.1 Y701.3
NetR781_2: R781.2 U600.C2
NetR782_1: R782.1 U600.P8
NetR783_1: R783.1 U600.R9
NetR786_2: R786.2 Y700.1
NetR787_2: R787.2 Y701.1
NetR901_2: R901.2 U900.A3 | length 21.2
  SIG01 w3.5: U900.A3@3618.09,3741.91 v1(3639.26,3741.91)
  other v1: 3893.48,3711.47
NetR903_2: R903.2 U900.A4 | length 63
  SIG01 w3.5: U900.A4@3618.09,3722.22 3652.54,3722.22 v1(3672.71,3702.05)
  other v1: 3802.53,3815.54
NetR905_2: R905.2 U900.A5 | length 21.2
  SIG01 w3.5: U900.A5@3618.09,3702.54 v1(3639.26,3702.54)
  other v1: 3893.48,3815.54
NetR917_2: R917.2 U900.M5 | length 22.1
  SIG01 w3.5: U900.M5@3401.55,3702.54 3411.96,3702.54 3417.53,3696.97 v1(3421.37,3696.97)
NetR918_2: R918.2 U900.M6 | length 25
  SIG01 w3.5: U900.M6@3401.55,3682.85 3408.81,3682.85 v1(3421.37,3670.29)
  other v1: 3801.54,3651.15
NetR919_2: R919.2 U900.H5 | length 21.6
  SIG01 w6: v1(3476.81,3722.65) 3476.81,3719.48 3480.29,3716 U900.H5@3480.29,3702.54
NetR921_2: R921.2 U900.K5 | length 33.5
  SIG01 w3.5: U900.K5@3440.92,3702.54 3456.46,3687 v1(3456.46,3675.51)
NetR1001_2: R1001.2 U1000.5
NetR1002_2: R1002.2 U1001.5
NetR1003_2: R1003.2 U1000.2
NetR1004_2: R1004.2 U1001.2
NetR1005_2: R1005.2 U1000.3
NetR1006_2: R1006.2 U1001.3
NetR1007_2: R1007.2 U1000.7
NetR1008_2: R1008.2 U1001.7
NetR1101_1: R1101.1 U1100.5
NetR1103_2: R1103.2 U1100.9
NetR1104_2: R1104.2 U1102.3
NetR1105_1: R1105.1 U1102.4
NetR1106_2: R1106.2 U1103.4
NetR1107_1: R1107.1 U1104.2
NetR1108_1: R1108.1 U1104.3
NetR1109_1: R1109.1 U1104.4
NetR1110_1: R1110.1 U1104.5
NetR1111_1: R1111.1 U1104.6
NetR1112_1: R1112.1 U1104.7
NetR1113_2: R1113.2 U1114.6
NetR1114_2: R1114.2 U1114.7
NetR1115_1: R1115.1 U1114.13
NetR1207_2: R1207.2 RT1200.1 U1200.3
NetR1208_2: R1208.2 RT1201.1 U1201.3
NetR1215_2: R1215.2 RT1202.1 U1202.3
NetR1216_2: R1216.2 RT1203.1 U1203.3
NOR_CS: R777.2 R1000.1 U1000.1 U1001.1
NOR_IO0: R773.2 R1001.1
NOR_IO1: R774.2 R1003.1
NOR_IO2: R771.2 R1005.1
NOR_IO3: R770.2 R1007.1
NOR_IO4: R734.2 R1002.1
NOR_IO5: R736.2 R1004.1
NOR_IO6: R721.2 R1006.1
NOR_IO7: R730.2 R1008.1
NOR_SCLK: R776.2 U1000.6 U1001.6
NRST: C700.1 R772.2 R920.2 R921.1 R1106.1 U600.K1 U701.1
SDRAM_CAS: R732.2 U400.K7
SDRAM_CKE: R741.2 U400.J2
SDRAM_CLK: R718.2 U400.J1
SDRAM_CS: R743.2 U400.J8
SDRAM_RAS: R778.2 U400.J9
SDRAM_WE: R762.2 U400.K8
SWCLK: R1103.1 U600.B14
SWDIO: R728.2 R1104.1
SWO: R738.2 U1100.8
T0: R739.2 U1104.14
T1: R740.2 U1104.13
T2: R742.2 U1104.12
T3: R744.2 U1104.11
T_CLK: U807.1 U807.10
T_INT: J800.38 R800.1 U807.2 U807.9
T_SCL: J800.39 R801.1 U807.4 U807.7
T_SDA: J800.40 R802.1 U807.5 U807.6
TCLK: R737.2 U1104.15
TMP_CH0: C1201.1 R1204.1 U600.M4 U600.N3 U1201.1
TMP_CH1: C1200.1 R1202.1 U1200.1
TO_DBG0: U600.R15 U1105.1
TO_DBG1: U600.N14 U1105.3
TO_DBG2: U600.M14 U1106.1
TO_DBG3: U600.L14 U1106.3
TO_DRV_EN: U600.F16 U701.2
VBAT: C203.2 C204.2 C205.2 C213.2 C214.2 Q200.5 Q200.6 Q200.7 Q200.8 U200.10 U200.11 U200.12 U200.13 U201.4 U202.10 U202.11 U202.12 U202.13
  other v1: 3349.01,2536.25 3384.26,2536.25 3349.01,2565.11 3349.01,2593.96 3417.74,2602.31 3457.11,2602.31 3437.42,2622 3349.01,2622.82 3417.74,2641.68 3457.11,2641.68 3361.26,2930.25 3396.51,2930.25 3361.26,2959.11 3361.26,2987.96 3361.26,3016.82
VDBG_C: C1110.2 C1111.1 C1112.2 C1113.2 Q1100.D U1105.5 U1106.5 U1108.5 U1109.5
VMCUA: C630.2 C631.2 L600.2 R600.1 U600.L1
VREF+: C632.2 C633.2 R600.2 U600.M1
pads on no net: J200.3 J200.4 J300. J800. J1100. Q200. U300.1 U300.44 U300.45 U300.46 U400.E3 U400.E7 U400.H3 U400.H7 U400.K2 U400.K3 U600.A12 U600.A13 U600.C1 U600.C5 U600.E1 U600.E3 U600.E13 U600.H15 U600.J1 U600.K16 U600.K17 U600.L16 U600.L17 U600.M16 U600.M17 U600.N13 U600.N15 U600.N17 U600.R1 U600.R2 U600.R6 U600.R12 U600.T11 U600.T14 U600.U13 U600.U14 U900.A7 U900.A9 U900.A10 U900.A11 U900.A12 U900.A13 U900.A14 U900.B8 U900.B9 U900.B10 U900.B11 U900.B12 U900.B13 U900.B14 U900.C1 U900.C7 U900.C8 U900.C9 U900.C10 U900.C11 U900.C12 U900.C13 U900.C14 U900.D4 U900.D12 U900.D13 U900.D14 U900.E3 U900.E5 U900.E8 U900.E9 U900.E10 U900.E12 U900.E13 U900.E14 U900.F1 U900.F2 U900.F3 U900.F10 U900.F12 U900.F13 U900.F14 U900.G1 U900.G2 U900.G3 U900.G10 U900.G12 U900.G13 U900.G14 U900.H1 U900.H2 U900.H3 U900.H12 U900.H13 U900.H14 U900.J1 U900.J2 U900.J3 U900.J12 U900.J13 U900.J14 U900.K1 U900.K2 U900.K3 U900.K6 U900.K7 U900.K10 U900.K12 U900.K13 U900.K14 U900.L1 U900.L2 U900.L3 U900.L12 U900.L13 U900.L14 U900.M1 U900.M2 U900.M3 U900.M7 U900.M8 U900.M9 U900.M10 U900.M11 U900.M12 U900.M13 U900.M14 U900.N3 U900.N6 U900.N7 U900.N8 U900.N9 U900.N10 U900.N11 U900.N12 U900.N13 U900.N14 U900.P1 U900.P2 U900.P7 U900.P8 U900.P9 U900.P10 U900.P11 U900.P12 U900.P13 U900.P14 U1101.1 U1101.5 U1104.10 U1114.8 U1114.12 U1117.4 U1117.5 U1117.6 U1117.7 U1118.5 U1118.6

## Polygon pours and split planes (outlines as drawn)
no net on GND02 (split plane): 6018.57,4075.45 6030.09,4074.32 6041.5,4072.43 6052.77,4069.81 6063.85,4066.45 6074.68,4062.37 6085.22,4057.59 6095.43,4052.14 6105.25,4046.03 6114.66,4039.29 6123.61,4031.95 6132.05,4024.04 6139.96,4015.59 6147.3,4006.64 6154.04,3997.24 6160.16,3987.41 6165.61,3977.2 6170.39,3966.66 6174.46,3955.83 6177.82,3944.76 6180.45,3933.49 6182.34,3922.07 6183.47,3910.55 6183.83,3899.68 6183.76,3898.99 6183.76,1235.11 6183.83,1234.41 6183.47,1223.54 6182.34,1212.02 6180.45,1200.61 6177.82,1189.33 6174.46,1178.26 6170.39,1167.43 6165.61,1156.89 6160.16,1146.68 6154.04,1136.86 6147.3,1127.45 6139.96,1118.5 6132.05,1110.06 6123.61,1102.15 6114.66,1094.81 6105.25,1088.06 6095.43,1081.95 6085.22,1076.5 6074.68,1071.72 6063.85,1067.65 6052.77,1064.29 6041.5,1061.66 6030.09,1059.77 6018.57,1058.64 6007.7,1058.28 6007,1058.35 3330,1058.35 3329.31,1058.28 3318.44,1058.64 3306.92,1059.77 3295.5,1061.66 3284.23,1064.29 3273.16,1067.65 3262.33,1071.72 3251.79,1076.5 3241.58,1081.95 3231.75,1088.06 3222.35,1094.81 3213.4,1102.15 3204.96,1110.06 3197.05,1118.5 3189.7,1127.45 3182.96,1136.86 3176.85,1146.68 3171.4,1156.89 3166.62,1167.43 3162.54,1178.26 3159.18,1189.33 3156.56,1200.61 3154.67,1212.02 3153.54,1223.54 3153.18,1234.41 3153.25,1235.11 3153.25,3898.99 3153.18,3899.68 3153.54,3910.55 3154.67,3922.07 3156.56,3933.49 3159.18,3944.76 3162.54,3955.83 3166.62,3966.66 3171.4,3977.2 3176.85,3987.41 3182.96,3997.24 3189.7,4006.64 3197.05,4015.59 3204.96,4024.04 3213.4,4031.95 3222.35,4039.29 3231.75,4046.03 3241.58,4052.14 3251.79,4057.59 3262.33,4062.37 3273.16,4066.45 3284.23,4069.81 3295.5,4072.43 3306.92,4074.32 3318.44,4075.45 3329.31,4075.81 3330,4075.74 6007,4075.74 6007.7,4075.81
no net on PWR04 (split plane): 6018.57,4075.45 6030.09,4074.32 6041.5,4072.43 6052.77,4069.81 6063.85,4066.45 6074.68,4062.37 6085.22,4057.59 6095.43,4052.14 6105.25,4046.03 6114.66,4039.29 6123.61,4031.95 6132.05,4024.04 6139.96,4015.59 6147.3,4006.64 6154.04,3997.24 6160.16,3987.41 6165.61,3977.2 6170.39,3966.66 6174.46,3955.83 6177.82,3944.76 6180.45,3933.49 6182.34,3922.07 6183.47,3910.55 6183.83,3899.68 6183.76,3898.99 6183.76,1235.11 6183.83,1234.41 6183.47,1223.54 6182.34,1212.02 6180.45,1200.61 6177.82,1189.33 6174.46,1178.26 6170.39,1167.43 6165.61,1156.89 6160.16,1146.68 6154.04,1136.86 6147.3,1127.45 6139.96,1118.5 6132.05,1110.06 6123.61,1102.15 6114.66,1094.81 6105.25,1088.06 6095.43,1081.95 6085.22,1076.5 6074.68,1071.72 6063.85,1067.65 6052.77,1064.29 6041.5,1061.66 6030.09,1059.77 6018.57,1058.64 6007.7,1058.28 6007,1058.35 3330,1058.35 3329.31,1058.28 3318.44,1058.64 3306.92,1059.77 3295.5,1061.66 3284.23,1064.29 3273.16,1067.65 3262.33,1071.72 3251.79,1076.5 3241.58,1081.95 3231.75,1088.06 3222.35,1094.81 3213.4,1102.15 3204.96,1110.06 3197.05,1118.5 3189.7,1127.45 3182.96,1136.86 3176.85,1146.68 3171.4,1156.89 3166.62,1167.43 3162.54,1178.26 3159.18,1189.33 3156.56,1200.61 3154.67,1212.02 3153.54,1223.54 3153.18,1234.41 3153.25,1235.11 3153.25,3898.99 3153.18,3899.68 3153.54,3910.55 3154.67,3922.07 3156.56,3933.49 3159.18,3944.76 3162.54,3955.83 3166.62,3966.66 3171.4,3977.2 3176.85,3987.41 3182.96,3997.24 3189.7,4006.64 3197.05,4015.59 3204.96,4024.04 3213.4,4031.95 3222.35,4039.29 3231.75,4046.03 3241.58,4052.14 3251.79,4057.59 3262.33,4062.37 3273.16,4066.45 3284.23,4069.81 3295.5,4072.43 3306.92,4074.32 3318.44,4075.45 3329.31,4075.81 3330,4075.74 6007,4075.74 6007.7,4075.81
no net on GND05 (split plane): 6018.57,4075.45 6030.09,4074.32 6041.5,4072.43 6052.77,4069.81 6063.85,4066.45 6074.68,4062.37 6085.22,4057.59 6095.43,4052.14 6105.25,4046.03 6114.66,4039.29 6123.61,4031.95 6132.05,4024.04 6139.96,4015.59 6147.3,4006.64 6154.04,3997.24 6160.16,3987.41 6165.61,3977.2 6170.39,3966.66 6174.46,3955.83 6177.82,3944.76 6180.45,3933.49 6182.34,3922.07 6183.47,3910.55 6183.83,3899.68 6183.76,3898.99 6183.76,1235.11 6183.83,1234.41 6183.47,1223.54 6182.34,1212.02 6180.45,1200.61 6177.82,1189.33 6174.46,1178.26 6170.39,1167.43 6165.61,1156.89 6160.16,1146.68 6154.04,1136.86 6147.3,1127.45 6139.96,1118.5 6132.05,1110.06 6123.61,1102.15 6114.66,1094.81 6105.25,1088.06 6095.43,1081.95 6085.22,1076.5 6074.68,1071.72 6063.85,1067.65 6052.77,1064.29 6041.5,1061.66 6030.09,1059.77 6018.57,1058.64 6007.7,1058.28 6007,1058.35 3330,1058.35 3329.31,1058.28 3318.44,1058.64 3306.92,1059.77 3295.5,1061.66 3284.23,1064.29 3273.16,1067.65 3262.33,1071.72 3251.79,1076.5 3241.58,1081.95 3231.75,1088.06 3222.35,1094.81 3213.4,1102.15 3204.96,1110.06 3197.05,1118.5 3189.7,1127.45 3182.96,1136.86 3176.85,1146.68 3171.4,1156.89 3166.62,1167.43 3162.54,1178.26 3159.18,1189.33 3156.56,1200.61 3154.67,1212.02 3153.54,1223.54 3153.18,1234.41 3153.25,1235.11 3153.25,3898.99 3153.18,3899.68 3153.54,3910.55 3154.67,3922.07 3156.56,3933.49 3159.18,3944.76 3162.54,3955.83 3166.62,3966.66 3171.4,3977.2 3176.85,3987.41 3182.96,3997.24 3189.7,4006.64 3197.05,4015.59 3204.96,4024.04 3213.4,4031.95 3222.35,4039.29 3231.75,4046.03 3241.58,4052.14 3251.79,4057.59 3262.33,4062.37 3273.16,4066.45 3284.23,4069.81 3295.5,4072.43 3306.92,4074.32 3318.44,4075.45 3329.31,4075.81 3330,4075.74 6007,4075.74 6007.7,4075.81

## Other copper
SIG01:
  region net +3V3: 3725.1,3225.79 3725.1,2921.1 3724.58,2920.58 3782.46,2920.58 3886.25,3024.36 3886.25,3162.05 3822.51,3225.79 3726.65,3225.79
  region net VBAT: 3309.03,2640.1 3348.72,2640.1 3352.24,2636.58 3381.76,2636.58 3381.76,2579.16 3394.04,2566.88 3407.89,2566.88 3407.89,2531.28 3389.02,2512.4 3309.03,2512.4
  region net VBAT: 3321.28,3034.1 3360.97,3034.1 3364.49,3030.58 3394.01,3030.58 3394.01,2973.16 3406.29,2960.88 3420.15,2960.88 3420.15,2925.28 3401.27,2906.4 3321.28,2906.4
  region net NetR205_1: 3462.41,2676.92 3462.41,2700.85 3439.2,2724.07 3394.28,2724.07 3388.59,2729.76 3388.59,2747.27 3488.75,2747.27 3488.75,2718 3471.59,2700.84 3471.59,2676.92
  region net NetL201_1: 3492.79,2636.52 3492.79,2574.85 3540.88,2526.76 3570.01,2526.76 3570.01,2575.51 3570.25,2575.75 3570.25,2624.38 3558.11,2636.52
  region net +5V: 3712.84,2831.79 3712.84,2527.1 3712.33,2526.58 3770.21,2526.58 3874,2630.37 3874,2768.05 3810.26,2831.79 3714.4,2831.79
  region net NetL200_1: 3505.04,3030.52 3505.04,2968.85 3553.13,2920.76 3582.26,2920.76 3582.26,2969.51 3582.5,2969.75 3582.5,3018.38 3570.36,3030.52
  region net NetR201_1: 3474.67,3070.92 3474.67,3094.85 3451.45,3118.07 3406.53,3118.07 3400.85,3123.76 3400.85,3141.27 3501,3141.27 3501,3112 3483.84,3094.84 3483.84,3070.92

## Silkscreen, mask and mechanical layers (free items; w line width, h text height)
Mechanical 1:
  the board outline again, w1